# EAGLE board SimulatorT2GenericSensorRevC_panel4 (EAGLE 7.7.0)
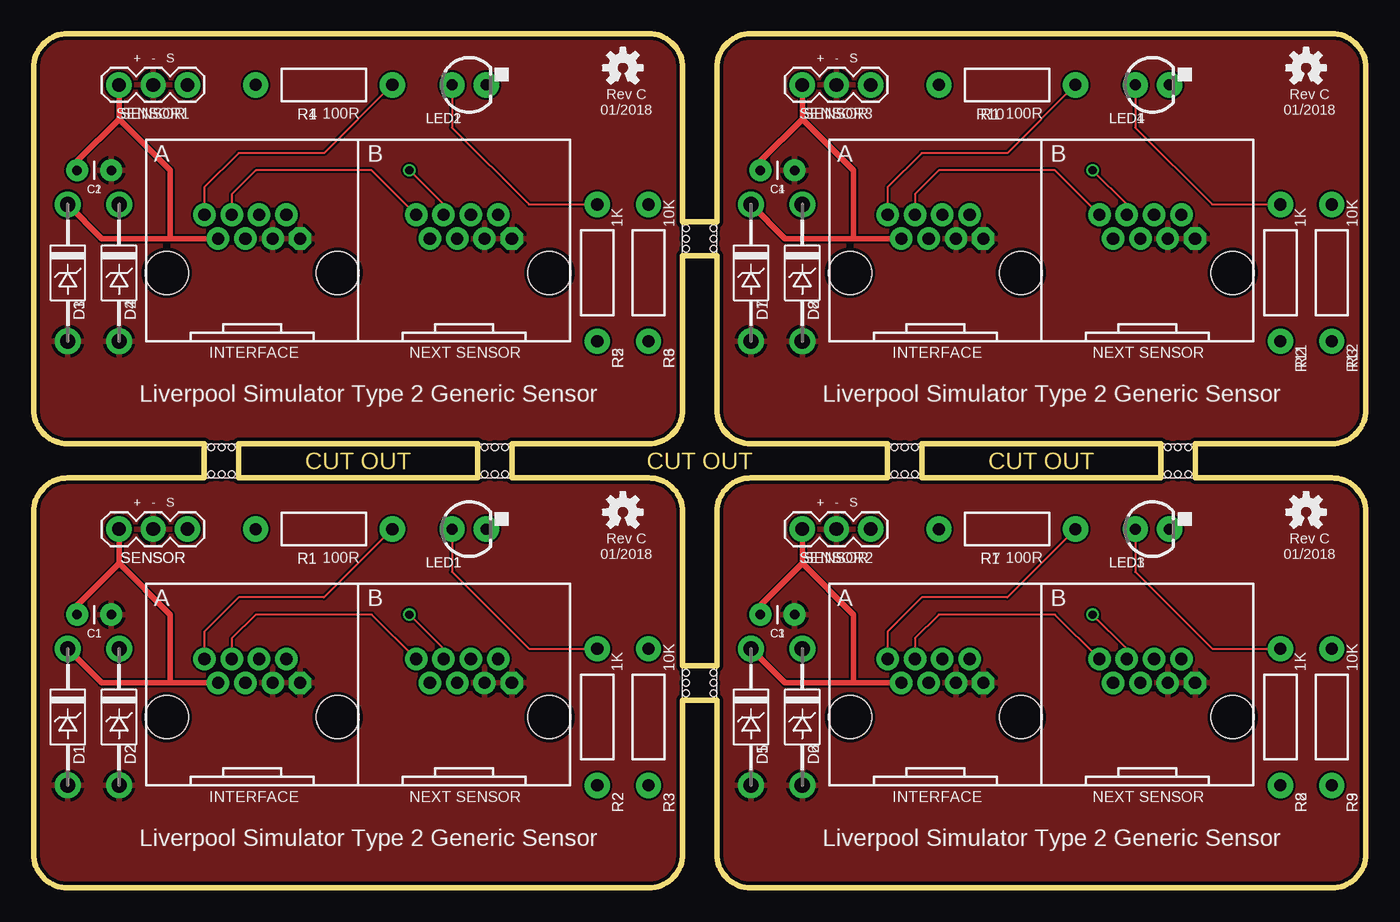
[diagram p0: board, top side]
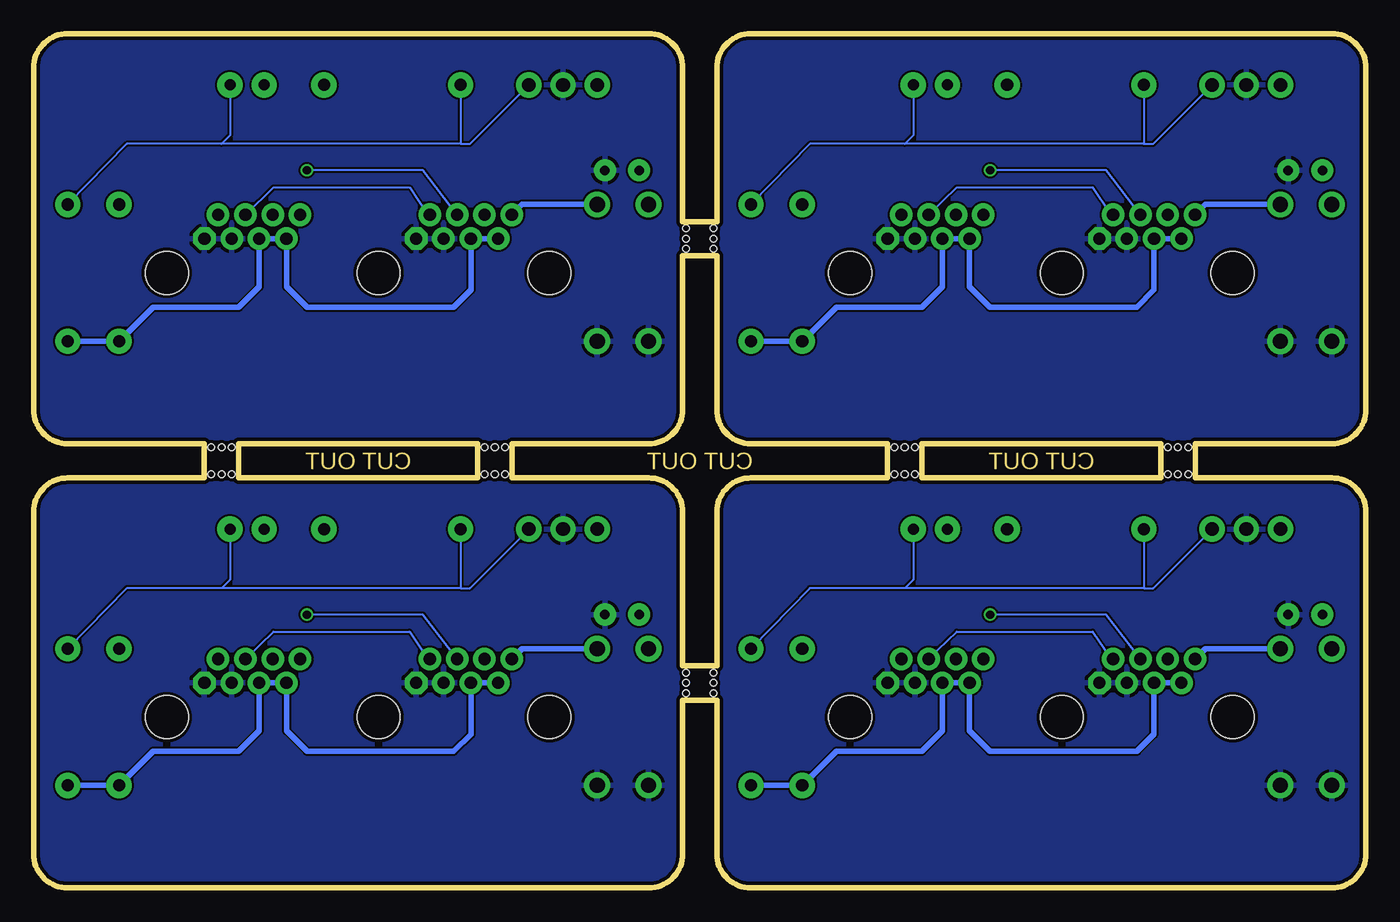
[diagram p1: board, bottom side, seen from below]

Size 99.06 x 63.5 mm. Coordinates in mm from the lower left corner, seen from the top.
Outline: 45.72,30.48 arc-90 48.26,27.94 48.26,16.51 50.8,16.51 50.8,27.94 arc-90 53.34,30.48 63.5,30.48 63.5,33.02 53.34,33.02 arc-90 50.8,35.56 50.8,46.99 48.26,46.99 48.26,35.56 arc-90 45.72,33.02 35.56,33.02 35.56,30.48 45.72,30.48
Outline: 48.26,2.54 arc-90 45.72,0 2.54,0 arc-90 0,2.54 0,27.94 arc-90 2.54,30.48 12.7,30.48 12.7,33.02 2.54,33.02 arc-90 0,35.56 0,60.96 arc-90 2.54,63.5 45.72,63.5 arc-90 48.26,60.96 48.26,49.53 50.8,49.53 50.8,60.96 arc-90 53.34,63.5 96.52,63.5 arc-90 99.06,60.96 99.06,35.56 arc-90 96.52,33.02 86.36,33.02 86.36,30.48 96.52,30.48 arc-90 99.06,27.94 99.06,2.54 arc-90 96.52,0 53.34,0 arc-90 50.8,2.54 50.8,13.97 48.26,13.97 48.26,2.54
Outline: 15.24,33.02 33.02,33.02 33.02,30.48 15.24,30.48 15.24,33.02
Outline: 83.82,33.02 66.04,33.02 66.04,30.48 83.82,30.48 83.82,33.02
Copper layers (1*16): Top 0.035mm / dielectric 1.5mm / Bottom 0.035mm
Design rules "SeeedStudio_2layer_DRU_no_angle_20140221": minimum track width 6mil, minimum drill 12mil, track to track 6mil, track to pad 6mil, pad to pad 6mil, via to via 6mil, smd to smd 0mil, copper to edge 10mil, drill to drill 10mil, minimum pad ring 10mil, minimum via ring 6mil, stop-mask expansion 2mil, vias tented up to drill 100mil, thermal gap 10mil

## Footprints (pad centres in the part's own frame; a part is rotated, then mirrored left to right if it is on the bottom)
CAP-PTH-SMALL = drill 0.7 pad 1.651: 1 0,0; 2 2.54,0
DO41_TVS_UNI = drill 1.118 pad 1.93: ANODE -5.08,0; CATHODE 5.08,0
STAMP_HOLES = hole 0.5: 0,-1.016; 0.762,-1.016; -0.762,-1.016; -0.762,1.016; 0,1.016; 0.762,1.016
RJ45-RJHSE-5080-02-3HOLE = drill 0.9 pad 1.676 octagon: A1 -4.318,2.54; B1 11.43,2.54 | drill 0.9 pad 1.676: A2 -5.334,4.318; A3 -6.35,2.54; A4 -7.366,4.318; A5 -8.382,2.54; A6 -9.398,4.318; A7 -10.414,2.54; A8 -11.43,4.318; B2 10.414,4.318; B3 9.398,2.54; B4 8.382,4.318; B5 7.366,2.54; B6 6.35,4.318; B7 5.334,2.54; B8 4.318,4.318 | hole 3.2: -14.224,0; 14.224,0; -1.524,0
LED3MM = drill 0.813 pad 1.88: A -1.27,0; K 1.27,0
AXIAL-0.4 = drill 0.9 pad 1.88: P$1 -5.08,0; P$2 5.08,0
1X03 = drill 1.016 pad 1.88: 1 0,0; 2 2.54,0; 3 5.08,0

## Placement (x,y rotation side)
C1  100nF  [CAP-PTH-SMALL]  3.24,20.32 0 top
C2  100nF  [CAP-PTH-SMALL]  3.24,53.34 0 top
C3  100nF  [CAP-PTH-SMALL]  54.04,20.32 0 top
C4  100nF  [CAP-PTH-SMALL]  54.04,53.34 0 top
D1  SA5.0A  [DO41_TVS_UNI]  2.54,12.7 90 top
D2  SA5.0A  [DO41_TVS_UNI]  6.35,12.7 90 top
D3  SA5.0A  [DO41_TVS_UNI]  2.54,45.72 90 top
D4  SA5.0A  [DO41_TVS_UNI]  6.35,45.72 90 top
D5  SA5.0A  [DO41_TVS_UNI]  53.34,12.7 90 top
D6  SA5.0A  [DO41_TVS_UNI]  57.15,12.7 90 top
D7  SA5.0A  [DO41_TVS_UNI]  53.34,45.72 90 top
D8  SA5.0A  [DO41_TVS_UNI]  57.15,45.72 90 top
E$1  [STAMP_HOLES]  34.29,31.75 0 top
E$2  [STAMP_HOLES]  13.97,31.75 0 top
E$3  [STAMP_HOLES]  64.77,31.75 0 top
E$4  [STAMP_HOLES]  85.09,31.75 0 top
E$5  [STAMP_HOLES]  49.53,48.26 90 top
E$6  [STAMP_HOLES]  49.53,15.24 90 top
JP1  RJ45-RJHSE-5080-023HOLE  [RJ45-RJHSE-5080-02-3HOLE]  24.13,12.7 0 top
JP2  RJ45-RJHSE-5080-023HOLE  [RJ45-RJHSE-5080-02-3HOLE]  24.13,45.72 0 top
JP3  RJ45-RJHSE-5080-023HOLE  [RJ45-RJHSE-5080-02-3HOLE]  74.93,12.7 0 top
JP4  RJ45-RJHSE-5080-023HOLE  [RJ45-RJHSE-5080-02-3HOLE]  74.93,45.72 0 top
LED1  Blue  [LED3MM]  32.38,26.67 0 top
LED2  Blue  [LED3MM]  32.38,59.69 0 top
LED3  Blue  [LED3MM]  83.19,26.67 0 top
LED4  Blue  [LED3MM]  83.19,59.69 0 top
LOGO1  OSHW-LOGOS  [OSHW-LOGO-S]  43.81,27.94 0 top
LOGO2  OSHW-LOGOS  [OSHW-LOGO-S]  43.81,60.96 0 top
LOGO3  OSHW-LOGOS  [OSHW-LOGO-S]  94.61,27.94 0 top
LOGO4  OSHW-LOGOS  [OSHW-LOGO-S]  94.61,60.96 0 top
R1  100R  [AXIAL-0.4]  21.59,26.67 180 top
R2  1K  [AXIAL-0.4]  41.91,12.7 270 top
R3  10K  [AXIAL-0.4]  45.72,12.7 270 top
R4  100R  [AXIAL-0.4]  21.59,59.69 180 top
R5  1K  [AXIAL-0.4]  41.91,45.72 270 top
R6  10K  [AXIAL-0.4]  45.72,45.72 270 top
R7  100R  [AXIAL-0.4]  72.39,26.67 180 top
R8  1K  [AXIAL-0.4]  92.71,12.7 270 top
R9  10K  [AXIAL-0.4]  96.52,12.7 270 top
R10  100R  [AXIAL-0.4]  72.39,59.69 180 top
R11  1K  [AXIAL-0.4]  92.71,45.72 270 top
R12  10K  [AXIAL-0.4]  96.52,45.72 270 top
SENSOR  [1X03]  6.35,26.67 0 top
SENSOR1  [1X03]  6.35,59.69 0 top
SENSOR2  [1X03]  57.15,26.67 0 top
SENSOR3  [1X03]  57.15,59.69 0 top

## Library data of the parts
C1-C4 R1-R12 = SparkFun-Passives
D1-D8 E$1-E$6 JP1-JP4 = AIC_Custom
LED1-LED4 = SparkFun-LED
LOGO1-LOGO4 = SparkFun-Aesthetics
SENSOR SENSOR1-SENSOR3 = SparkFun-Connectors

## Nets
!OUT!: D2.CATHODE JP1.A8 R1.P$1
!OUT!1: D4.CATHODE JP2.A8 R4.P$1
!OUT!2: D6.CATHODE JP3.A8 R7.P$1
!OUT!3: D8.CATHODE JP4.A8 R10.P$1
B1: JP2.A6 JP2.B8
B2: JP1.A6 JP1.B8
B3: JP1.A4 JP1.B6
B4: JP1.A2 JP1.B4
B5: JP2.A4 JP2.B6
B6: JP2.A2 JP2.B4
B7: JP3.A6 JP3.B8
B8: JP3.A4 JP3.B6
B9: JP3.A2 JP3.B4
B10: JP4.A6 JP4.B8
B11: JP4.A4 JP4.B6
B12: JP4.A2 JP4.B4
GND: C1.2 D1.ANODE D2.ANODE JP1.A1 JP1.A3 JP1.B1 JP1.B3 SENSOR.2
GND1: C2.2 D3.ANODE D4.ANODE JP2.A1 JP2.A3 JP2.B1 JP2.B3 SENSOR1.2
GND2: C3.2 D5.ANODE D6.ANODE JP3.A1 JP3.A3 JP3.B1 JP3.B3 SENSOR2.2
GND3: C4.2 D7.ANODE D8.ANODE JP4.A1 JP4.A3 JP4.B1 JP4.B3 SENSOR3.2
LED: LED1.A R2.P$1
LED1: LED2.A R5.P$1
LED2: LED3.A R8.P$1
LED3: LED4.A R11.P$1
SIG: LED1.K R1.P$2 R3.P$1 SENSOR.3
SIG1: LED2.K R4.P$2 R6.P$1 SENSOR1.3
SIG2: LED3.K R7.P$2 R9.P$1 SENSOR2.3
SIG3: LED4.K R10.P$2 R12.P$1 SENSOR3.3
VCC: C1.1 D1.CATHODE JP1.A5 JP1.A7 JP1.B5 JP1.B7 R2.P$2 R3.P$2 SENSOR.1
VCC1: C2.1 D3.CATHODE JP2.A5 JP2.A7 JP2.B5 JP2.B7 R5.P$2 R6.P$2 SENSOR1.1
VCC2: C3.1 D5.CATHODE JP3.A5 JP3.A7 JP3.B5 JP3.B7 R8.P$2 R9.P$2 SENSOR2.1
VCC3: C4.1 D7.CATHODE JP4.A5 JP4.A7 JP4.B5 JP4.B7 R11.P$2 R12.P$2 SENSOR3.1

## Tracks (layer width: path | path; a pad name or v marks a point on that pad's centre or on a via)
!OUT!
  Top 0.152: R1.P$1 21.59,21.59 15.24,21.59 12.7,19.05 JP1.A8
  Bottom 0.152: 12.7,17.14 JP1.A8
  Bottom 0.406: D2.CATHODE 11.94,17.78 JP1.A8
!OUT!1
  Top 0.152: R4.P$1 21.59,54.61 15.24,54.61 12.7,52.07 JP2.A8
  Bottom 0.152: 12.7,50.16 JP2.A8
  Bottom 0.406: D4.CATHODE 11.94,50.8 JP2.A8
!OUT!2
  Top 0.152: R7.P$1 72.39,21.59 66.04,21.59 63.5,19.05 JP3.A8
  Bottom 0.152: 63.5,17.14 JP3.A8
  Bottom 0.406: D6.CATHODE 62.74,17.78 JP3.A8
!OUT!3
  Top 0.152: R10.P$1 72.39,54.61 66.04,54.61 63.5,52.07 JP4.A8
  Bottom 0.152: 63.5,50.16 JP4.A8
  Bottom 0.406: D8.CATHODE 62.74,50.8 JP4.A8
B1
  Top 0.152: JP2.B8 25.15,53.34 16.51,53.34 14.73,51.56 JP2.A6
B2
  Top 0.152: JP1.B8 25.15,20.32 16.51,20.32 14.73,18.54 JP1.A6
B3  (via drill 0.6 pad 0.25)
  Top 0.152: v27.94,20.32 30.48,17.78 JP1.B6
  Bottom 0.152: JP1.A4 19.3,20.32 v27.94,20.32
B4
  Bottom 0.152: JP1.B4 30.42,19.05 20.32,19.05 19.05,17.14 JP1.A2
B5  (via drill 0.6 pad 0.25)
  Top 0.152: v27.94,53.34 30.48,50.8 JP2.B6
  Bottom 0.152: JP2.A4 19.3,53.34 v27.94,53.34
B6
  Bottom 0.152: JP2.B4 30.42,52.07 20.32,52.07 19.05,50.16 JP2.A2
B7
  Top 0.152: JP3.B8 75.95,20.32 67.31,20.32 65.53,18.54 JP3.A6
B8  (via drill 0.6 pad 0.25)
  Top 0.152: v78.74,20.32 81.28,17.78 JP3.B6
  Bottom 0.152: JP3.A4 70.1,20.32 v78.74,20.32
B9
  Bottom 0.152: JP3.B4 81.22,19.05 71.12,19.05 69.85,17.14 JP3.A2
B10
  Top 0.152: JP4.B8 75.95,53.34 67.31,53.34 65.53,51.56 JP4.A6
B11  (via drill 0.6 pad 0.25)
  Top 0.152: v78.74,53.34 81.28,50.8 JP4.B6
  Bottom 0.152: JP4.A4 70.1,53.34 v78.74,53.34
B12
  Bottom 0.152: JP4.B4 81.22,52.07 71.12,52.07 69.85,50.16 JP4.A2
GND
  pour Top: 2.54,30.48 45.72,30.48 arc-90 48.26,27.94 48.26,2.54 arc-90 45.72,0 2.54,0 arc-90 0,2.54 0,27.94 arc-90
  pour Bottom: 2.54,30.48 45.72,30.48 arc-90 48.26,27.94 48.26,2.54 arc-90 45.72,0 2.54,0 arc-90 0,2.54 0,27.94 arc-90
GND1
  pour Top: 2.54,63.5 45.72,63.5 arc-90 48.26,60.96 48.26,35.56 arc-90 45.72,33.02 2.54,33.02 arc-90 0,35.56 0,60.96 arc-90
  pour Bottom: 2.54,63.5 45.72,63.5 arc-90 48.26,60.96 48.26,35.56 arc-90 45.72,33.02 2.54,33.02 arc-90 0,35.56 0,60.96 arc-90
GND2
  pour Top: 53.34,30.48 96.52,30.48 arc-90 99.06,27.94 99.06,2.54 arc-90 96.52,0 53.34,0 arc-90 50.8,2.54 50.8,27.94 arc-90
  pour Bottom: 53.34,30.48 96.52,30.48 arc-90 99.06,27.94 99.06,2.54 arc-90 96.52,0 53.34,0 arc-90 50.8,2.54 50.8,27.94 arc-90
GND3
  pour Top: 53.34,63.5 96.52,63.5 arc-90 99.06,60.96 99.06,35.56 arc-90 96.52,33.02 53.34,33.02 arc-90 50.8,35.56 50.8,60.96 arc-90
  pour Bottom: 53.34,63.5 96.52,63.5 arc-90 99.06,60.96 99.06,35.56 arc-90 96.52,33.02 53.34,33.02 arc-90 50.8,35.56 50.8,60.96 arc-90
LED
  Top 0.152: LED1.A 31.11,23.5 36.83,17.78 R2.P$1
LED1
  Top 0.152: LED2.A 31.11,56.52 36.83,50.8 R5.P$1
LED2
  Top 0.152: LED3.A 81.92,23.5 87.63,17.78 R8.P$1
LED3
  Top 0.152: LED4.A 81.92,56.52 87.63,50.8 R11.P$1
SIG
  Bottom 0.152: 16.51,22.29 34.29,22.29 | R1.P$2 16.51,22.29 | 34.29,22.29 41.34,22.29 R3.P$1 | LED1.K 33.66,22.92 34.29,22.29 | 16.51,22.29 15.81,22.29 SENSOR.3
SIG1
  Bottom 0.152: 16.51,55.31 34.29,55.31 | R4.P$2 16.51,55.31 | 34.29,55.31 41.34,55.31 R6.P$1 | LED2.K 33.66,55.94 34.29,55.31 | 16.51,55.31 15.81,55.31 SENSOR1.3
SIG2
  Bottom 0.152: 67.31,22.29 85.09,22.29 | R7.P$2 67.31,22.29 | 85.09,22.29 92.14,22.29 R9.P$1 | LED3.K 84.45,22.92 85.09,22.29 | 67.31,22.29 66.61,22.29 SENSOR2.3
SIG3
  Bottom 0.152: 67.31,55.31 85.09,55.31 | R10.P$2 67.31,55.31 | 85.09,55.31 92.14,55.31 R12.P$1 | LED4.K 84.45,55.94 85.09,55.31 | 67.31,55.31 66.61,55.31 SENSOR3.3
VCC
  Top 0.406: 10.16,15.24 JP1.A7 | 10.16,15.24 10.16,20.32 6.35,24.13 | D1.CATHODE 5.08,15.24 10.16,15.24 | SENSOR.1 6.35,24.13 | C1.1 3.24,21.02 6.35,24.13
  Bottom 0.406: JP1.A7 JP1.A5 15.75,11.43 17.02,10.16 27.94,10.16 29.46,11.68 JP1.B7 JP1.B5 31.5,11.68 33.02,10.16 39.37,10.16 R2.P$2 R3.P$2
VCC1
  Top 0.406: 10.16,48.26 JP2.A7 | 10.16,48.26 10.16,53.34 6.35,57.15 | D3.CATHODE 5.08,48.26 10.16,48.26 | SENSOR1.1 6.35,57.15 | C2.1 3.24,54.04 6.35,57.15
  Bottom 0.406: JP2.A7 JP2.A5 15.75,44.45 17.02,43.18 27.94,43.18 29.46,44.7 JP2.B7 JP2.B5 31.5,44.7 33.02,43.18 39.37,43.18 R5.P$2 R6.P$2
VCC2
  Top 0.406: 60.96,15.24 JP3.A7 | 60.96,15.24 60.96,20.32 57.15,24.13 | D5.CATHODE 55.88,15.24 60.96,15.24 | SENSOR2.1 57.15,24.13 | C3.1 54.04,21.02 57.15,24.13
  Bottom 0.406: JP3.A7 JP3.A5 66.55,11.43 67.82,10.16 78.74,10.16 80.26,11.68 JP3.B7 JP3.B5 82.3,11.68 83.82,10.16 90.17,10.16 R8.P$2 R9.P$2
VCC3
  Top 0.406: 60.96,48.26 JP4.A7 | 60.96,48.26 60.96,53.34 57.15,57.15 | D7.CATHODE 55.88,48.26 60.96,48.26 | SENSOR3.1 57.15,57.15 | C4.1 54.04,54.04 57.15,57.15
  Bottom 0.406: JP4.A7 JP4.A5 66.55,44.45 67.82,43.18 78.74,43.18 80.26,44.7 JP4.B7 JP4.B5 82.3,44.7 83.82,43.18 90.17,43.18 R11.P$2 R12.P$2

## Text on the board
Dimension: CUT OUT | CUT OUT | CUT OUT
tPlace: + - S | + - S | Rev C / 01/2018 | Rev C / 01/2018 | INTERFACE | NEXT SENSOR | INTERFACE | NEXT SENSOR | Liverpool Simulator Type 2 Generic Sensor | Liverpool Simulator Type 2 Generic Sensor | + - S | + - S | Rev C / 01/2018 | Rev C / 01/2018 | INTERFACE | NEXT SENSOR | INTERFACE | NEXT SENSOR | Liverpool Simulator Type 2 Generic Sensor | Liverpool Simulator Type 2 Generic Sensor
_tNames: SENSOR | R1 | LED1 | SENSOR | R1 | LED1 | C1 | C1 | D1 | D2 | D1 | D2 | R2 | R3 | R2 | R3 | SENSOR | R1 | LED1 | SENSOR | R1 | LED1 | C1 | C1 | D1 | D2 | D1 | D2 | R2 | R3 | R2 | R3